# EAGLE board VoiceRecognition (EAGLE 9.2.1)
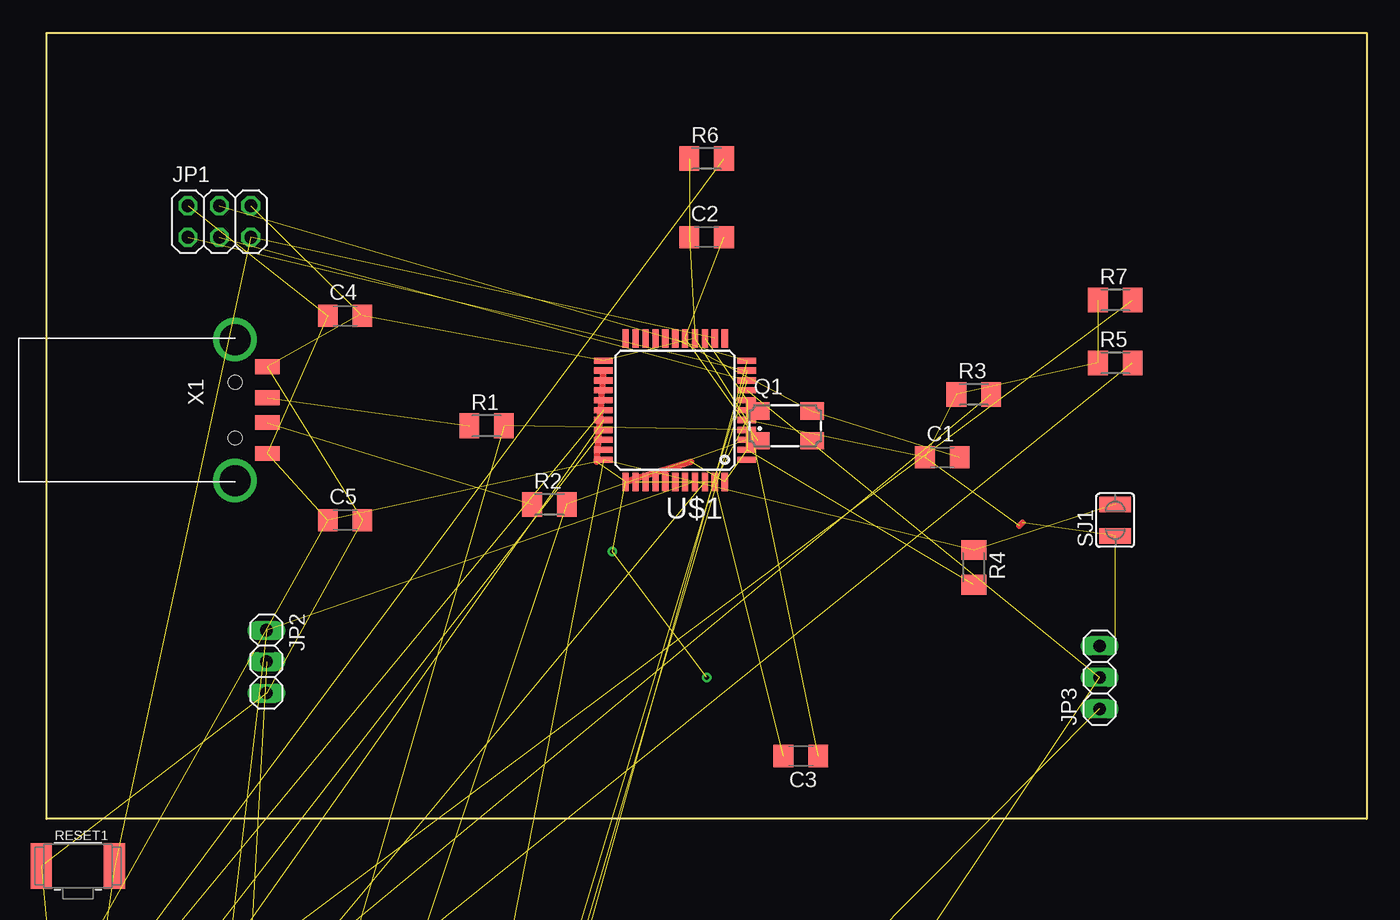
[diagram p0: board, top side]

Size 106.68 x 63.5 mm. Coordinates in mm from the lower left corner, seen from the top.
Outline: 0,0 0,63.5 106.68,63.5 106.68,0 0,0
Copper layers (1*16): Top 0.035mm / dielectric 1.5mm / Bottom 0.035mm
Design rules "default": minimum track width 6mil, minimum drill 0.35mm, track to track 6mil, track to pad 6mil, pad to pad 6mil, via to via 6mil, smd to smd 6mil, copper to edge 40mil, drill to drill 6mil, minimum pad ring 10mil, minimum via ring 8mil, stop-mask expansion 4mil, vias tented up to drill 0mil, thermal gap 10mil

## Footprints (pad centres in the part's own frame; a part is rotated, then mirrored left to right if it is on the bottom)
TP15SQ = smd 1.5 x 1.5: TP 0,0
C1206 = smd 1.6 x 1.8: 1 -1.4,0; 2 1.4,0
POWER_JACK_SMD = smd 2.8 x 2.4: GND 0,-5.7; P$4 6.1,-5.7; VIN0 0,5.7; VIN1 6.1,5.7 | hole 2.032: 0,0; 4.572,0
2X03 = drill 1.016 octagon: 1 -2.54,-1.27; 2 -2.54,1.27; 3 0,-1.27; 4 0,1.27; 5 2.54,-1.27; 6 2.54,1.27
1X03 = drill 1.016 long: 1 -2.54,0; 2 0,0; 3 2.54,0
1206 = smd 1.6 x 1.803: A -1.422,0; C 1.422,0
BTN_CK_KSS = smd 1.7 x 3.7: P$1 -2.95,0; P$2 2.95,0
CTS406 = smd 1.9 x 1.4: 1 -2.2,-1.2; 2 2.2,-1.2; 3 2.2,1.2; 4 -2.2,1.2
M1206 = smd 1.6 x 2: 1 -1.4,0; 2 1.4,0
SJW = smd 1.27 x 2.54: 1 -1.27,0; 2 1.27,0
TQFP44 = smd 1.5 x 0.5: 1 -5.8,4; 2 -5.8,3.2; 3 -5.8,2.4; 4 -5.8,1.6; 5 -5.8,0.8; 6 -5.8,0; 7 -5.8,-0.8; 8 -5.8,-1.6; 9 -5.8,-2.4; 10 -5.8,-3.2; 11 -5.8,-4; 23 5.8,-4; 24 5.8,-3.2; 25 5.8,-2.4; 26 5.8,-1.6; 27 5.8,-0.8; 28 5.8,0; 29 5.8,0.8; 30 5.8,1.6; 31 5.8,2.4; 32 5.8,3.2; 33 5.8,4 | smd 0.5 x 1.5: 12 -4,-5.8; 13 -3.2,-5.8; 14 -2.4,-5.8; 15 -1.6,-5.8; 16 -0.8,-5.8; 17 0,-5.8; 18 0.8,-5.8; 19 1.6,-5.8; 20 2.4,-5.8; 21 3.2,-5.8; 22 4,-5.8; 34 4,5.8; 35 3.2,5.8; 36 2.4,5.8; 37 1.6,5.8; 38 0.8,5.8; 39 0,5.8; 40 -0.8,5.8; 41 -1.6,5.8; 42 -2.4,5.8; 43 -3.2,5.8; 44 -4,5.8
MOLEX_480371000 = smd 1.2 x 2: 1 3.5,2.6; 2 1,2.6; 3 -1,2.6; 4 -3.5,2.6 | drill 2.5: M1 -5.7,0; M2 5.7,0 | hole 1.1: -2.25,0; 2.25,0

## Placement (x,y rotation side)
!HWB  TPTP15SQ  [TP15SQ]  0,-201.93 0 top  (outside the outline)
C1  18pF  [C1206]  72.39,29.21 0 top
C2  18pF  [C1206]  53.34,46.99 0 top
C3  1uF  [C1206]  60.96,5.08 180 top
C4  100nF  [C1206]  24.13,40.64 0 top
C5  10uF  [C1206]  24.13,24.13 0 top
C6  100nF  [C1206]  1.27,-88.9 0 top  (outside the outline)
C7  10uF  [C1206]  1.27,-219.71 0 top  (outside the outline)
C8  100nF  [C1206]  1.27,-36.83 0 top  (outside the outline)
C12  100nF  [C1206]  1.27,-68.58 0 top  (outside the outline)
D+  TPTP15SQ  [TP15SQ]  0,-95.25 0 top  (outside the outline)
D-  TPTP15SQ  [TP15SQ]  0,-100.33 0 top  (outside the outline)
FUNC_GRN  TPTP15SQ  [TP15SQ]  0,-186.69 0 top  (outside the outline)
GND_BARREL  TPTP15SQ  [TP15SQ]  0,-146.05 0 top  (outside the outline)
GND_ICSP  TPTP15SQ  [TP15SQ]  0,-176.53 0 top  (outside the outline)
J1  5.5x2.1mm Barrel  [POWER_JACK_SMD]  3.81,-78.74 0 top  (outside the outline)
JP1  [2X03]  13.97,48.26 0 top
JP2  [1X03]  17.78,12.7 270 top
JP3  [1X03]  85.09,11.43 90 top
LED2  [1206]  1.27,-21.59 0 top  (outside the outline)
LED3  [1206]  1.27,-26.67 0 top  (outside the outline)
LED4  [1206]  1.27,-31.75 0 top  (outside the outline)
MIC_ON  [BTN_CK_KSS]  2.54,-207.01 0 top  (outside the outline)
MIC_SIGNAL  TPTP15SQ  [TP15SQ]  0,-135.89 0 top  (outside the outline)
MISO  TPTP15SQ  [TP15SQ]  0,-166.37 0 top  (outside the outline)
MOSI  TPTP15SQ  [TP15SQ]  0,-151.13 0 top  (outside the outline)
NOFUNC_RED  TPTP15SQ  [TP15SQ]  0,-196.85 0 top  (outside the outline)
PWR-BLU  [1206]  1.27,-16.51 0 top  (outside the outline)
PWR_BLU  TPTP15SQ  [TP15SQ]  0,-181.61 0 top  (outside the outline)
Q1  16MHz  [CTS406]  59.69,31.75 0 top
R1  22  [M1206]  35.56,31.75 0 top
R2  22  [M1206]  40.64,25.4 0 top
R3  1k  [M1206]  74.93,34.29 0 top
R4  10k  [M1206]  74.93,20.32 270 top
R5  1k  [M1206]  86.36,36.83 0 top
R6  1k  [M1206]  53.34,53.34 0 top
R7  1k  [M1206]  86.36,41.91 0 top
R8  10k  [M1206]  1.27,-43.18 0 top  (outside the outline)
RESET  TPTP15SQ  [TP15SQ]  0,-226.06 0 top  (outside the outline)
RESET1  [BTN_CK_KSS]  2.54,-3.81 0 top  (outside the outline)
SCK  TPTP15SQ  [TP15SQ]  0,-156.21 0 top  (outside the outline)
SERVO_SIGNAL  TPTP15SQ  [TP15SQ]  0,-115.57 0 top  (outside the outline)
SJ1  [SJW]  86.36,24.13 90 top
TP4  TPTP15SQ  [TP15SQ]  0,-110.49 0 top  (outside the outline)
TP7  TPTP15SQ  [TP15SQ]  0,-125.73 0 top  (outside the outline)
U$1  ATMEGA32U4-AU  [TQFP44]  50.8,33.02 180 top
V_BARREL  TPTP15SQ  [TP15SQ]  0,-140.97 0 top  (outside the outline)
V_ICSP  TPTP15SQ  [TP15SQ]  0,-171.45 0 top  (outside the outline)
VCC  TPTP15SQ  [TP15SQ]  0,-120.65 0 top  (outside the outline)
VCC_TO_MIC  TPTP15SQ  [TP15SQ]  0,-231.14 0 top  (outside the outline)
WARN_YELL  TPTP15SQ  [TP15SQ]  0,-191.77 0 top  (outside the outline)
X1  USB-A  [MOLEX_480371000]  15.24,33.02 270 top

## Library data of the parts
!HWB D+ D- FUNC_GRN GND_BARREL GND_ICSP MIC_SIGNAL MISO MOSI NOFUNC_RED PWR_BLU RESET SCK SERVO_SIGNAL TP4 TP7 V_BARREL V_ICSP VCC VCC_TO_MIC WARN_YELL = testpad
C1-C8 C12 = rcl; SPICEPREFIX: C
J1 = SparkFun-Connectors; PROD_ID: CONN-08106; SF_ID: PRT-12748
JP1-JP3 = pinhead
LED2-LED4 PWR-BLU = led
MIC_ON RESET1 U$1 X1 = adafruit
Q1 = adafruit; OC_FARNELL: unknown; OC_NEWARK: unknown
R1-R8 = rcl; SPICEPREFIX: R
SJ1 = jumper

## Nets
FUNC_GRN: FUNC_GRN.TP LED2.A U$1.28
GND: C1.1 C2.1 C3.2 C4.2 C5.2 C6.2 C7.2 C8.2 C12.2 GND_BARREL.TP GND_ICSP.TP J1.GND J1.P$4 JP1.6 JP2.3 JP3.3 R3.1 R5.1 R6.1 R7.1 RESET1.P$1 SJ1.1 TP7.TP U$1.5 U$1.15 U$1.23 U$1.35 U$1.43 X1.4
HWB: !HWB.TP R4.1 SJ1.2 U$1.33
MIC_SIGNAL: JP2.1 MIC_SIGNAL.TP U$1.41
N$1: C3.1 U$1.6
N$2: JP1.3 SCK.TP U$1.9
N$3: R1.1 X1.3
N$5: PWR-BLU.C R6.2
N$6: LED2.C R7.2
N$7: LED4.C R5.2
N$8: LED3.C R3.2
N$9: R2.1 X1.2
N$12: D+.TP R1.2 U$1.4
N$13: JP1.1 MOSI.TP U$1.10
N$14: C8.1 U$1.42
N$15: C7.1 JP2.2 MIC_ON.P$2 VCC_TO_MIC.TP
N$16: C1.2 Q1.3 U$1.17
N$17: JP1.4 MISO.TP U$1.11
N$20: D-.TP R2.2 U$1.3
N$22: C2.2 Q1.1 U$1.16
NOFUNC_RED: LED3.A NOFUNC_RED.TP U$1.30
RST: JP1.5 R8.1 RESET1.P$2 RESET.TP TP4.TP U$1.13
SERVO_POS: J1.VIN0 JP3.1 V_BARREL.TP
SIGNAL: JP3.2 SERVO_SIGNAL.TP U$1.8
VCC: C4.1 C5.1 C6.1 C12.1 JP1.2 MIC_ON.P$1 PWR-BLU.A PWR_BLU.TP R4.2 R8.2 U$1.2 U$1.7 U$1.14 U$1.24 U$1.34 U$1.44 V_ICSP.TP VCC.TP X1.1
WARN_YELL: LED4.A U$1.29 WARN_YELL.TP

## Tracks (layer width: path | path; a pad name or v marks a point on that pad's centre or on a via)
FUNC_GRN  (2 unrouted)
GND  (29 unrouted)
  Top 0.508: 86.36,13.97 JP3.3 | 78.84,23.94 78.6,23.7 | 25.4,40.77 C4.2
HWB  (3 unrouted)
MIC_SIGNAL  (2 unrouted)
N$1  (1 unrouted)
N$2  (2 unrouted)
N$3  (1 unrouted)
N$5  (1 unrouted)
N$6  (1 unrouted)
N$7  (1 unrouted)
N$8  (1 unrouted)
N$9  (1 unrouted)
N$12  (2 unrouted)
N$13  (2 unrouted)
N$14  (1 unrouted)
N$15  (3 unrouted)
N$16  (2 unrouted)
N$17  (2 unrouted)
N$18
  Top 0.152: 106.68,63.5 0,63.5 0,0 106.68,0
N$20  (2 unrouted)
N$22  (2 unrouted)
NOFUNC_RED  (2 unrouted)
RST  (5 unrouted)
SERVO_POS  (2 unrouted)
SIGNAL  (2 unrouted)
VCC  (via drill 0.35)  (20 unrouted)
  Top 0.508: U$1.24 44.45,28.85 | 52.07,28.84 U$1.34
  other vias: 45.72,21.59 53.34,11.43
WARN_YELL  (2 unrouted)